# EAGLE board CT_schematic (EAGLE 7.6.0)

Size 100 x 80 mm. Coordinates in mm from the lower left corner, seen from the top.
Outline: 0,0 100,0 100,80 0,80 0,0
Copper layers (1*16): Top 0.035mm / dielectric 1.5mm / Bottom 0.035mm
Design rules "default": minimum track width 10mil, minimum drill 24mil, track to track 8mil, track to pad 8mil, pad to pad 8mil, via to via 8mil, smd to smd 8mil, copper to edge 40mil, drill to drill 8mil, minimum pad ring 10mil, minimum via ring 8mil, stop-mask expansion 4mil, vias tented up to drill 0mil, thermal gap 10mil

## Footprints (pad centres in the part's own frame; a part is rotated, then mirrored left to right if it is on the bottom)
C0603 = smd 0.8 x 0.8: 1 -0.762,0; 2 0.762,0
C0402 = smd 0.5 x 0.5: 1 -0.508,0; 2 0.508,0
C1210 = smd 1.2 x 2.5: 1 -1.524,0; 2 1.524,0
EXV-9H = smd 3.505 x 1.676: 1 -2.857,0; 2 2.857,0
PJ-037B_PACKAGE = drill 3.7 square: 1 12,0 | drill 3.2 square: 2 6,0
R0603 = smd 0.8 x 0.8: 1 -0.762,0; 2 0.762,0
QFN-32 = smd 0.6 x 0.3: 1 -2.3,1.75; 2 -2.3,1.25; 3 -2.3,0.75; 4 -2.3,0.25; 5 -2.3,-0.25; 6 -2.3,-0.75; 7 -2.3,-1.25; 8 -2.3,-1.75; 17 2.3,-1.75; 18 2.3,-1.25; 19 2.3,-0.75; 20 2.3,-0.25; 21 2.3,0.25; 22 2.3,0.75; 23 2.3,1.25; 24 2.3,1.75 | smd 0.3 x 0.6: 9 -1.75,-2.3; 10 -1.25,-2.3; 11 -0.75,-2.3; 12 -0.25,-2.3; 13 0.25,-2.3; 14 0.75,-2.3; 15 1.25,-2.3; 16 1.75,-2.3; 25 1.75,2.3; 26 1.25,2.3; 27 0.75,2.3; 28 0.25,2.3; 29 -0.25,2.3; 30 -0.75,2.3; 31 -1.25,2.3; 32 -1.75,2.3 | smd 3.2 x 3.2: EXP 0,0
SAMTEC_FTSH-105-01-L-DV-K = smd 0.762 x 2.794: 1 -2.54,-2.032; 2 -2.54,2.032; 3 -1.27,-2.032; 4 -1.27,2.032; 5 0,-2.032; 6 0,2.032; 7 1.27,-2.032; 8 1.27,2.032; 9 2.54,-2.032; 10 2.54,2.032
LGA-16 = smd 1.5 x 0.4: 1 -2.1,0.975; 2 -2.1,0.325; 3 -2.1,-0.325; 4 -2.1,-0.975; 9 2.1,-0.975; 10 2.1,-0.325; 11 2.1,0.325; 12 2.1,0.975 | smd 0.4 x 1.5: 5 -0.975,-2.1; 6 -0.325,-2.1; 7 0.325,-2.1; 8 0.975,-2.1; 13 0.975,2.1; 14 0.325,2.1; 15 -0.325,2.1; 16 -0.975,2.1
ABS07-32.768KHZ-7-T = smd 1.1 x 2.4: 1 -2.5,0; 2 0,0
ASFL1 = smd 1.7 x 1.5: 1 -1.27,-1.1; 2 1.27,-1.1; 3 1.27,1.1; 4 -1.27,1.1
SOIC-8_EP = smd 1.6 x 0.533: 1 -2.921,1.905; 2 -2.921,0.635; 3 -2.921,-0.635; 4 -2.921,-1.905; 5 2.921,-1.905; 6 2.921,-0.635; 7 2.921,0.635; 8 2.921,1.905 | smd 2.54 x 3.302: EPAD 0,0 | drill 0.406 pad 0.406: P$1 -0.508,0.635; P$2 0.381,0.635; P$3 -0.508,-0.635; P$4 0.381,-0.635
SON-6 = smd 0.55 x 0.3: 1 -0.355,0.5 | smd 0.52 x 0.3: 2 -0.37,0; 3 -0.37,-0.5; 4 0.37,-0.5; 5 0.37,0; 6 0.37,0.5
SW_4-1437565-2 = smd 1.4 x 2.1: 1 -2.23,4.55; 2 -2.23,-4.55; 3 2.23,4.55; 4 2.23,-4.55
LGM67K-G1J2-24-Z = smd 0.8 x 1.4: A -2,0; C 0,0
NC7SZ125M5X = smd 1.3 x 0.7: 1 -1.3,0.95; 2 -1.3,0; 3 -1.3,-0.95; 4 1.3,-0.95; 5 1.3,0.95
DUMMY_PACKAGE_118 = drill 0.3: 1 0,-1; 2 1.5,-1; 3 3,-1

## Placement (x,y rotation side)
C1  1e-07  [C0603]  -46.99,49.53 0 top  (outside the outline)
C2  1e-07  [C0603]  -50.8,49.53 0 top  (outside the outline)
C3  1e-07  [C0603]  -54.61,49.53 0 top  (outside the outline)
C4  1e-07  [C0603]  -58.42,49.53 0 top  (outside the outline)
C5  4.7e-06  [C0603]  -39.37,49.53 0 top  (outside the outline)
C6  1e-08  [C0603]  -62.23,49.53 0 top  (outside the outline)
C7  1e-06  [C0603]  -15.24,54.61 0 top  (outside the outline)
C8  1e-11  [C0402]  -41.91,54.61 0 top  (outside the outline)
C9  1e-11  [C0402]  -45.72,54.61 0 top  (outside the outline)
C10  1e-07  [C0402]  -49.53,54.61 0 top  (outside the outline)
C11  1e-08  [C0402]  -53.34,54.61 0 top  (outside the outline)
C12  1e-08  [C0402]  -57.15,54.61 0 top  (outside the outline)
C13  1e-08  [C0402]  -60.96,54.61 0 top  (outside the outline)
C14  4.7e-07  [C0603]  -43.18,49.53 0 top  (outside the outline)
C15  1e-08  [C0402]  -15.24,59.69 0 top  (outside the outline)
C16  1e-05  [C1210]  -35.56,38.1 0 top  (outside the outline)
C17  1e-05  [C1210]  -41.91,38.1 0 top  (outside the outline)
C18  1e-05  [C1210]  -48.26,38.1 0 top  (outside the outline)
C19  1e-05  [C1210]  -54.61,38.1 0 top  (outside the outline)
C20  1e-07  [C0402]  -19.05,59.69 0 top  (outside the outline)
C21  0.0001  [EXV-9H]  -17.78,30.48 0 top  (outside the outline)
C22  0.0001  [EXV-9H]  -29.21,30.48 0 top  (outside the outline)
C23  1e-08  [C0402]  -22.86,59.69 0 top  (outside the outline)
C24  1e-08  [C0402]  -26.67,59.69 0 top  (outside the outline)
J1  PJ-037B  [PJ-037B_PACKAGE]  -57.15,7.62 0 top  (outside the outline)
R1  10000.0  [R0603]  -40.64,44.45 0 top  (outside the outline)
R2  1000.0  [R0603]  -19.05,54.61 0 top  (outside the outline)
R3  1600.5  [R0603]  -22.86,54.61 0 top  (outside the outline)
R4  4700.0  [R0603]  -26.67,54.61 0 top  (outside the outline)
R5  10000.0  [R0603]  -45.72,44.45 0 top  (outside the outline)
R6  10000.0  [R0603]  -50.8,44.45 0 top  (outside the outline)
R7  10000.0  [R0603]  -55.88,44.45 0 top  (outside the outline)
R8  10000.0  [R0603]  -60.96,44.45 0 top  (outside the outline)
R9  10000.0  [R0603]  -15.24,49.53 0 top  (outside the outline)
R10  5.0  [R0603]  -30.48,54.61 0 top  (outside the outline)
R11  10000.0  [R0603]  -20.32,49.53 0 top  (outside the outline)
R12  10000.0  [R0603]  -25.4,49.53 0 top  (outside the outline)
R13  4031.5447154472  [R0603]  -25.4,44.45 0 top  (outside the outline)
R14  2200.0  [R0603]  -34.29,54.61 0 top  (outside the outline)
R15  10000.0  [R0603]  -30.48,49.53 0 top  (outside the outline)
R16  10000.0  [R0603]  -35.56,49.53 0 top  (outside the outline)
R17  9100.0  [R0603]  -38.1,54.61 0 top  (outside the outline)
R18  680000.0  [R0603]  -30.48,44.45 0 top  (outside the outline)
R19  120000.0  [R0603]  -35.56,44.45 0 top  (outside the outline)
U1  STM32L431KCU6  [QFN-32]  -43.18,20.32 0 top  (outside the outline)
U2  FTSH-105-01-L-DV-K  [SAMTEC_FTSH-105-01-L-DV-K]  -35.56,7.62 0 top  (outside the outline)
U3  l3g4200d  [LGA-16]  -16.51,38.1 0 top  (outside the outline)
U4  ABS07-32.768KHZ-7-T  [ABS07-32.768KHZ-7-T]  -50.8,30.48 0 top  (outside the outline)
U5  ASFL1-12MHZ-NCS  [ASFL1]  -60.96,19.05 0 top  (outside the outline)
U6  MIC5234YME  [SOIC-8_EP]  -59.69,29.21 0 top  (outside the outline)
U7  TPS3895ADRYR  [SON-6]  -35.56,58.42 0 top  (outside the outline)
U8  4-1437565-2  [SW_4-1437565-2]  -27.94,20.32 0 top  (outside the outline)
U9  Q65110A2395  [LGM67K-G1J2-24-Z]  -24.13,38.1 0 top  (outside the outline)
U10  nc7sz125m5x  [NC7SZ125M5X]  -59.69,36.83 0 top  (outside the outline)
U11  nc7sz125m5x  [NC7SZ125M5X]  -15.24,43.18 0 top  (outside the outline)
U12  Dummy  [DUMMY_PACKAGE_118]  -33.02,59.69 0 top  (outside the outline)

## Library data of the parts
C1-C24 J1 R1-R19 U1-U12 = circuit_tree

## Nets
CLK_CRYSTAL_U1_2: C8.1 U1.2 U4.1
CLK_CRYSTAL_U1_3: C9.1 U1.3 U4.2
CLK_U1_6: U1.6 U5.3
GND: C1.2 C2.2 C3.2 C4.2 C5.2 C6.2 C7.2 C8.2 C9.2 C10.2 C11.2 C12.2 C13.2 C15.2 C16.2 C17.2 C18.2 C19.2 C20.2 C21.2 C22.2 C23.2 C24.2 J1.2 R2.2 R5.2 R9.2 R10.2 R11.1 R11.2 R14.2 R17.2 R19.2 U1.16 U1.32 U1.EXP U2.3 U2.5 U3.8 U3.9 U3.10 U3.11 U3.12 U3.13 U5.2 U6.7 U6.EPAD U7.2 U9.C U10.2 U10.3 U11.1 U11.3 U12.1
NET_U1_4: R4.1 U1.4 U11.4
NET_U1_30: R3.1 U1.30 U9.A
NET_U1_31: R1.1 R5.1 U1.31 U8.3 U8.4
NET_U2_9: R10.1 U2.9
NET_U3_14: C13.1 C14.1 U3.14
NET_U3_ATNET_1: C14.2
NET_U6_4: R13.2 R14.1 U6.4
NET_U7_1: R16.1 R17.1 U7.1
NET_U7_3: R18.2 R19.1 U7.3
NET_U7_4: R15.1 U7.4 U10.4 U11.2
NET_U8_1: R2.1 U8.1 U8.2
PROC_SPI1_MISO: U1.12 U3.4
PROC_SPI1_MOSI: U1.13 U3.3
PROC_SPI1_NSS: R12.1 U1.10 U3.5
PROC_SPI1_SCK: U1.7 U3.2
PROC_SYS_JTCK_SWCLK: R9.1 U1.24 U2.4
PROC_SYS_JTDI: R7.1 U1.25 U2.8
PROC_SYS_JTDO_SWO: U1.26 U2.6
PROC_SYS_JTMS_SWDIO: R8.1 U1.23 U2.2
PROC_TIM1_CH2: U1.19 U12.2
PROC_TIM1_CH4: U1.21 U12.3
RST_OUT_U2_JTAG_RST_B: R6.1 U2.10 U10.1
VCC_S1_9V9: C16.1 C17.1 C21.1 C22.1 J1.1 U6.5 U6.8
VCC_TIER1_3V3: C1.1 C2.1 C3.1 C4.1 C5.1 C6.1 C7.1 C10.1 C11.1 C12.1 C15.1 C18.1 C19.1 C20.1 C23.1 C24.1 R1.2 R3.2 R4.2 R6.2 R7.2 R8.2 R12.2 R13.1 R15.2 R16.2 R18.1 U1.1 U1.5 U1.17 U2.1 U3.1 U3.15 U3.16 U5.4 U6.1 U7.6 U10.5 U11.5

## Tracks (layer width: path | path; a pad name or v marks a point on that pad's centre or on a via)
CLK_CRYSTAL_U1_2  (2 unrouted)
CLK_CRYSTAL_U1_3  (2 unrouted)
CLK_U1_6  (1 unrouted)
GND  (53 unrouted)
NET_U1_4  (2 unrouted)
NET_U1_30  (2 unrouted)
NET_U1_31  (4 unrouted)
NET_U2_9  (1 unrouted)
NET_U3_14  (2 unrouted)
NET_U6_4  (2 unrouted)
NET_U7_1  (2 unrouted)
NET_U7_3  (2 unrouted)
NET_U7_4  (3 unrouted)
NET_U8_1  (2 unrouted)
PROC_SPI1_MISO  (1 unrouted)
PROC_SPI1_MOSI  (1 unrouted)
PROC_SPI1_NSS  (2 unrouted)
PROC_SPI1_SCK  (1 unrouted)
PROC_SYS_JTCK_SWCLK  (2 unrouted)
PROC_SYS_JTDI  (2 unrouted)
PROC_SYS_JTDO_SWO  (1 unrouted)
PROC_SYS_JTMS_SWDIO  (2 unrouted)
PROC_TIM1_CH2  (1 unrouted)
PROC_TIM1_CH4  (1 unrouted)
RST_OUT_U2_JTAG_RST_B  (2 unrouted)
VCC_S1_9V9  (6 unrouted)
VCC_TIER1_3V3  (38 unrouted)